# Altium PCB PIC12F675_ADC_PWM.PcbDoc
Units mil, origin at the board's own origin, x right, y up, seen from the top; angles counter-clockwise.
Board outline 1975 x 1050 mil, 2 copper layers (Top Layer, Bottom Layer); 24 components, 14 nets, 64 pads, 8 vias.
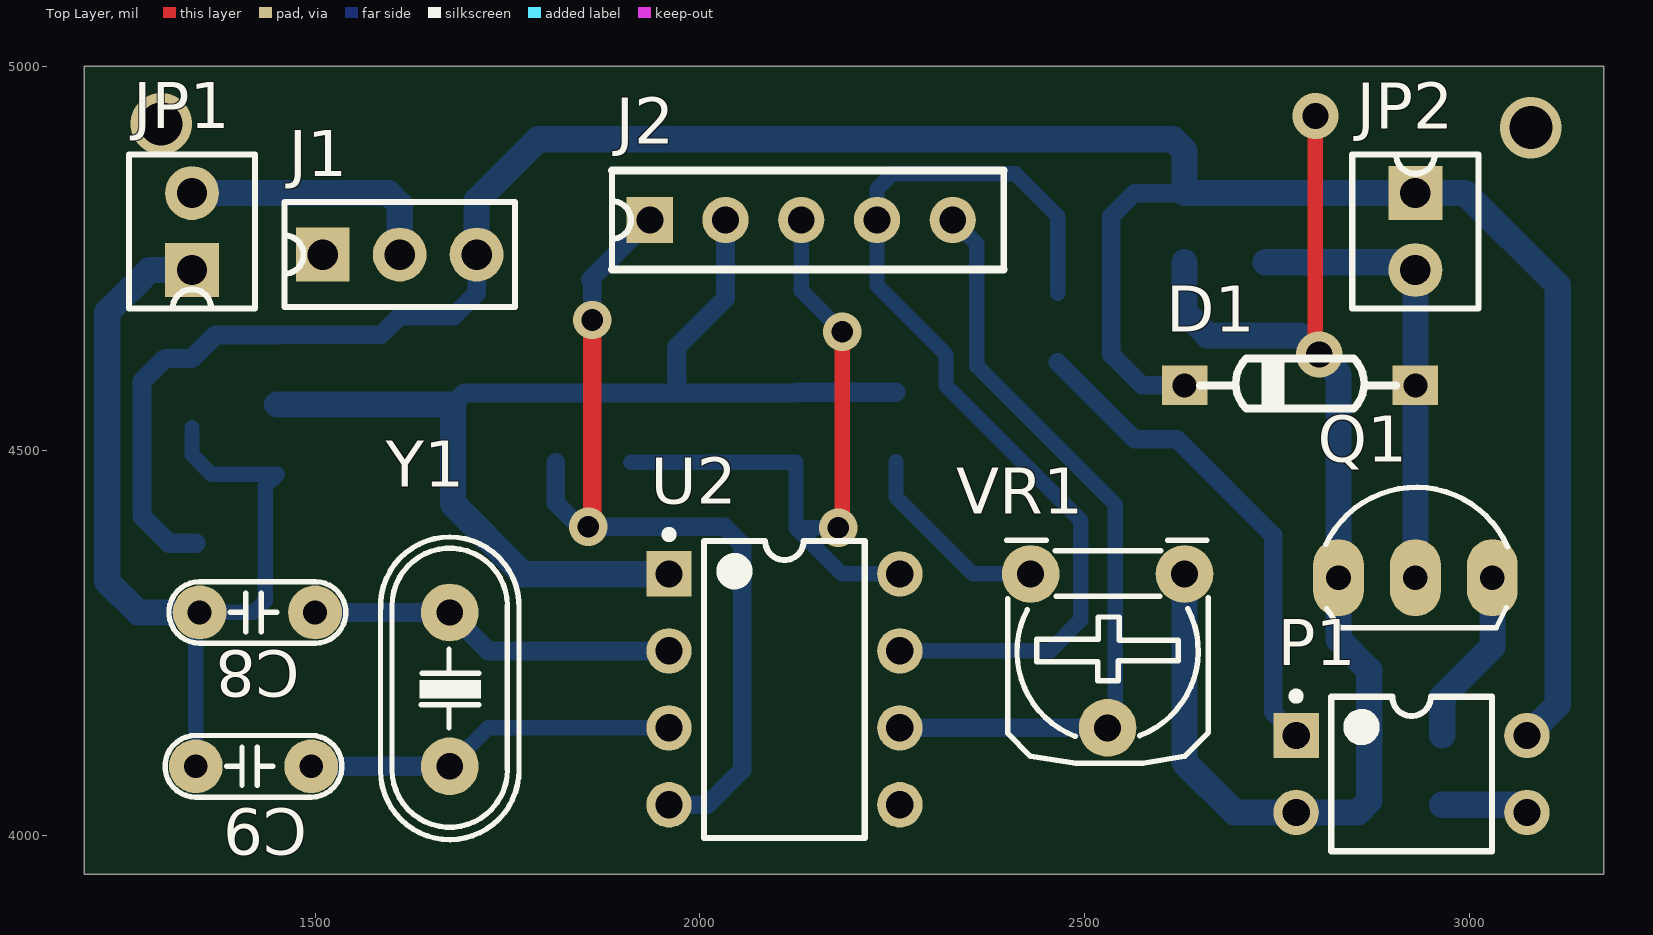
[diagram p0: Top Layer view]
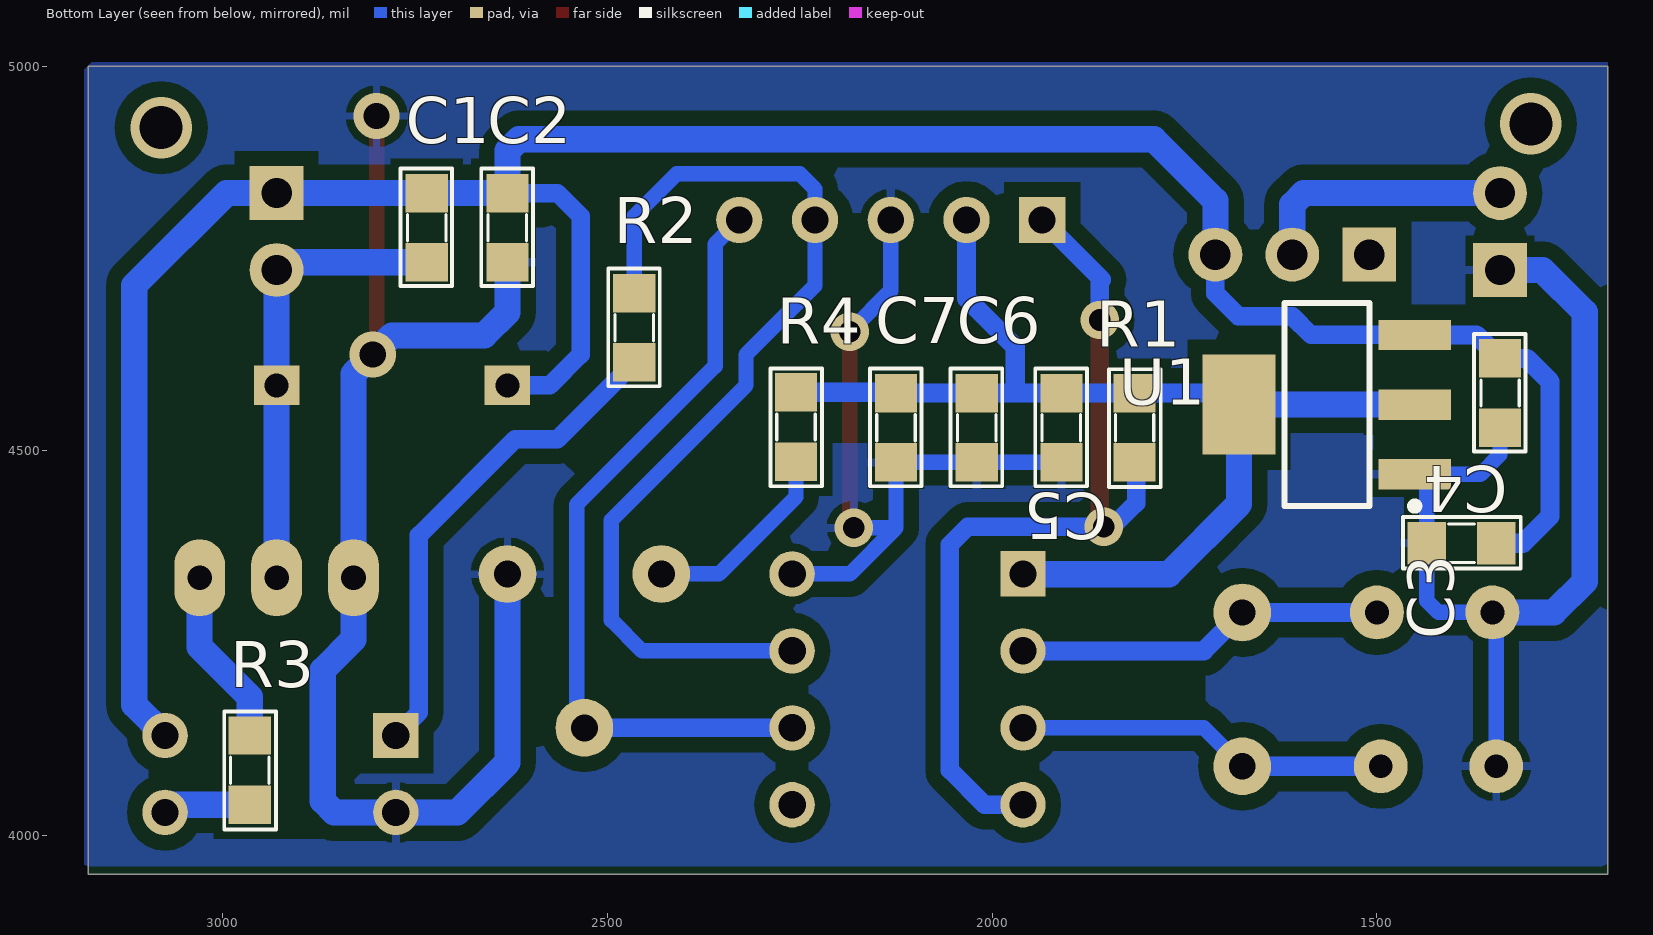
[diagram p1: Bottom Layer view, seen from below]
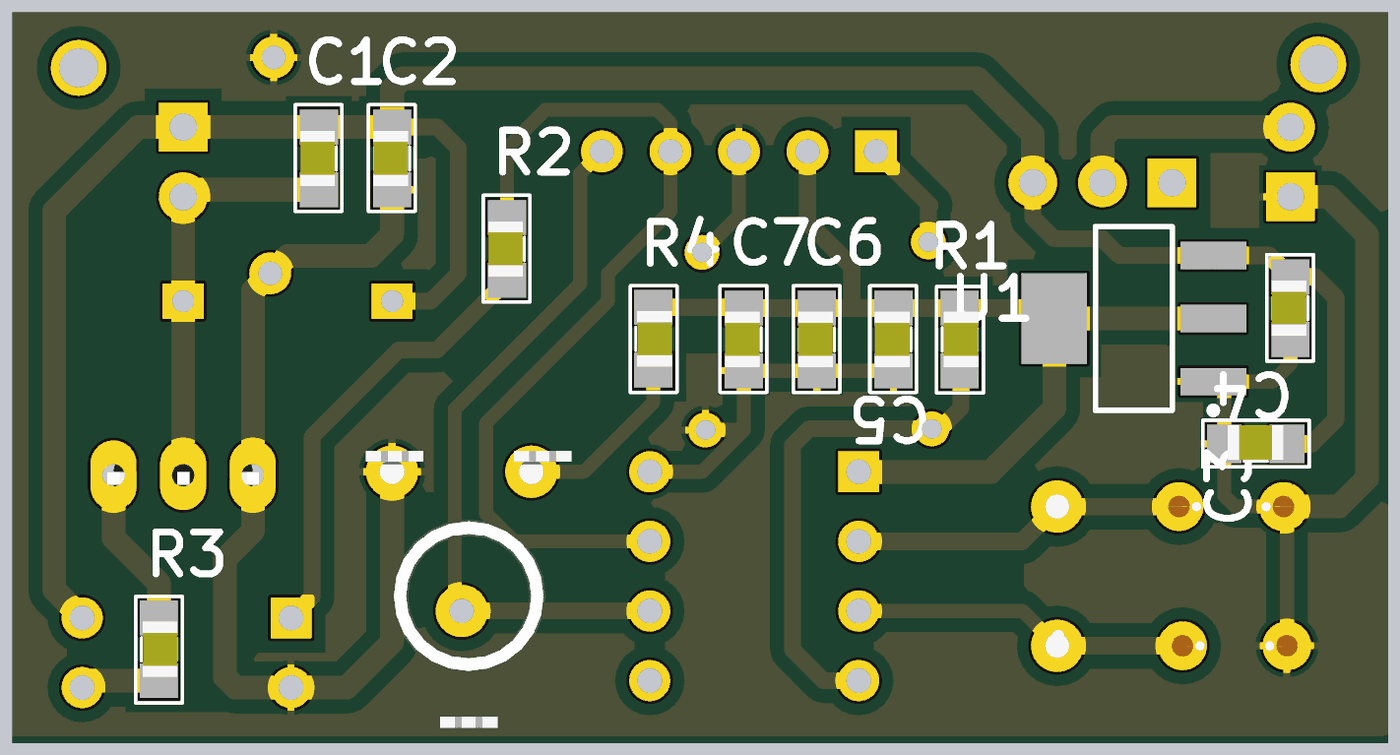
[diagram p2: 3D render of the assembled board from below, using the file's embedded part models]

## Layer stack, top to bottom
Top Solder: solder mask 0.4, Solder Resist, Dk 3.5
Top Layer: signal copper 1.4
Dielectric 1: dielectric 12.6, FR-4, Dk 4.8
Bottom Layer: signal copper 1.4
Bottom Solder: solder mask 0.4, Solder Resist, Dk 3.5

## Board outline
1200,5000 3175,5000 3175,3950 1200,3950 1200,4995 1200,5000

## Design rules (kind name [scope] priority, off if disabled: settings)
Clearance [All] p1: gap=20
PolygonConnect [All] p1: connectstyle=Relief reliefconductorwidth=10 reliefentries=4 polygonreliefangle="90 Angle" airgapwidth=10
RoutingVias [All] p1: holewidth=28 width=50 viastyle="Through Hole" minholewidth=28 minwidth=50 maxholewidth=28 maxwidth=50
SolderMaskExpansion [All] p1: expansion=4
Width [All] p1: maxlimit=34 minlimit=20 preferedwidth=25
30 further rules are at their usual default settings.

## Components (designator, comment, footprint, x,y, rotation, side; value= is the part's Value field where it differs from the comment)
C1 "104" 0805 2735,4790 r270 bottom
C2 "10uF" 0805 2630,4790 r270 bottom
C3 "10uF" 0805 1390,4380 r0 bottom
C4 "104" 0805 1340,4575 r270 bottom
C5 "10uF" 0805 1910,4530 r270 bottom
C6 "104" 0805 2020,4530 r270 bottom
C7 "10u" 0805 2125,4530 r270 bottom
C8 "103" CN1.5 1350,4290 r0 top
C9 "103" CN1.5 1345,4090 r0 top
D1 "DIODE" DIODE/NOM/0.5A 2930,4585 r180 top
J1 "CON3" CON3 1510,4755 r90 top
J2 "ICSP" con5 1935,4800 r90 top
JP1 "JP2" CON2 1340,4735 r180 top
JP2 "JP2" CON2 2930,4835 r0 top
P1 "PC817" DIP-4 2925,4080 r0 top
Q1 "C2073" QTO-92 2930,4335 r0 top
R1 "10k" 0805 1815,4530 r90 bottom
R2 "150" 0805 2465,4660 r270 bottom
R3 "150" 0805 2965,4085 r90 bottom
R4 "33k" 0805 2255,4531 r90 bottom
U1 "LM1117-3.3V" SOT223-4N 1565,4560 r0 bottom
U2 "PIC12F683-I/P" PDIP300-P8 2110,4190 r0 top
VR1 "10K" VR 2630,4340 r180 top
Y1 "20MHz" XT2 1675,4190 r270 top

## Footprints (in the part's own frame and the unit in brackets; to place one, negate y for a bottom-side part, rotate by r counter-clockwise, add the part's x,y. Pads: shape width x height; smd on the part's side, far side on the other; paste and mask are expansions set on the pad)
0805 [mil] "Compoment SMD 80x50mil"
  rect 50x55 smd: 1(-45,0) 2(45,0)
  silkscreen extent -77,-34 76,33, body extent -40,-27 40,23, height 24
CN1.5 [mil]
  round 70 hole 31: 1(0,0) 2(150,0)
  silkscreen extent -40,-40 190,40, body extent -40,-33 190,33, height 235
CON2 [mil]
  rect 70x70 hole 39.37 unplated: 1(0,0)
  round 70 hole 39.37 unplated: 2(0,-100)
  silkscreen extent -82,-150 82,50
CON3 [mil]
  rect 70x70 hole 39.37 unplated: 1(0,0)
  round 70 hole 39.37 unplated: 2(0,-100) 3(0,-200)
  silkscreen extent -68,-250 68,50
con5 [mil]
  rect 60x60 hole 35: 1(0,0)
  round 60 hole 35: 2(0,-98.42) 3(0,-196.85) 4(0,-295.28) 5(0,-393.7)
  silkscreen extent -64,-460 64,49
DIODE/NOM/0.5A [mm]
  rect 1.5x1.3 hole 0.8: 1(0,0) 2(7.62,0)
  silkscreen extent 0.64,-0.89 7.11,0.76
DIP-4 [mm] "DIP; 4 Leads; Row Spacing 7.62 mm; Pitch 2.54 mm"
  rect 1.5x1.5 hole 0.9: 1(-3.81,1.27)
  round 1.5 hole 0.9: 2(-3.81,-1.27) 3(3.81,-1.27) 4(3.81,1.27)
  silkscreen extent -3.93,-2.55 2.65,2.69, body extent -3.15,-2.5 3.15,2.5, height 5.6
PDIP300-P8 [mm] "DIP, 8-Leads, Row Spacing 7.62mm, Pitch 2.54mm, Body 9.5x6.6mm"
  rect 1.5x1.5 hole 0.9: 1(-3.81,3.81)
  round 1.5 hole 0.9: 2(-3.81,1.27) 3(-3.81,-1.27) 4(-3.81,-3.81) 5(3.81,-3.81) 6(3.81,-1.27) 7(3.81,1.27) 8(3.81,3.81)
  silkscreen extent -3.93,-4.9 2.65,5.23, body extent -3.55,-4.9 3.55,4.9, height 4.32
QTO-92 [mil] "TO-92"
  oval 66x100 hole 32: 1(-100,0) 2(0,0) 3(100,0)
  silkscreen extent -117,-65 120,118, body extent -109,-66 109,95, height 245
SOT223-4N [mm] "SOT223, 4-Leads, Body 6.5x3.5mm, Pitch 2.3mm, Lead Span 7mm, IPC Medium Density"
  rect 2.4x1 smd: 1(-2.9,2.3) 2(-2.9,0) 3(-2.9,-2.3)
  rect 2.4x3.3 smd: 4(2.9,0)
  silkscreen extent -3.02,-3.35 1.4,3.47, body extent -1.85,-3.35 1.85,3.35, height 1.8
VR [mil] "Resistor Variable"
  round 75 hole 35: 1(0,0) 2(100,200) 3(200,0)
  silkscreen extent -31,-44 231,246, body extent -87,-30 307,372, height 165
XT2 [mil] "Footpin for Crystal 2 pin"
  round 75 hole 34: 1(-100,0) 2(100,0)
  silkscreen extent -198,-90 195,90, body extent -233,-93 213,90, height 138

## Part data
C1 C2 C3 C4 C5 C6 C7: library part "CAP 0805"
C8 C9: library part CN1.5, "Cap np 682pF => 104pF"
D1: "Diode"
J1: "Connector"
J2: library part CON5, "Connector"
JP1 JP2: library part CON2, "Connector 2"
P1: "NPN PHOTO General Purpose Amplifier"
Q1: library part C1815, "NPN 600mW, ECB"
R1 R2 R3 R4: library part R1/4W, "Resistor 1/4W"
U1: library part LM1117_1, "800mA Low-Dropout Linear Regulator"
U2: "Flash-Based 8-Bit CMOS Microcontroller with nanoWatt Technology, 2K (x14-Bit words) Program Memory, 384 Bytes Data Memory, 8-Pin PDIP, Industrial Temperature"
VR1: library part "Var Resitor", "Var Resistor"
Y1: library part Crystal, "Crystal Oscillator"

## Via types
v1: diameter 50, hole 28, Top Layer to Bottom Layer, 4 vias
v2: diameter 80, hole 56, Top Layer to Bottom Layer, 2 vias
v3: diameter 60, hole 34, Top Layer to Bottom Layer, 2 vias

## Nets (pads, with @x,y where several pads share a name; then routed paths per layer and width w, separated by ;. In a path a pad name is that pad's centre, name@x,y a point inside that pad or via, vN(x,y) a via of type N, cw(c..) or ccw(c..) an arc to the next point about the centre after c; other vN are vias at no path point)
3V3: C5.1 C6.1 C7.1 J2.2 R1.2 R4.2 U1.2 U2.1 | length 1508.7
  Bottom Layer w25: 1679.17,4560 1694.17,4575 1845,4575 1970,4575 ; J2.2 2033.42,4698.43 1970,4635 1970,4575 ; C7.1 1970,4575 ; C7.1@2126,4576 R4.2
  Bottom Layer w34: U1.2 1679.17,4560 1679.17,4430.83 1770.47,4339.53 1959.53,4339.53 U2.1
9V: C1.1 C2.1 C3.1 C4.1 D1.2 J1.3 JP2.1 P1.4 U1.3 | length 3418.8
  Bottom Layer w24: U1.3 1585.55,4650.55 1610,4675 1680,4675 1710,4705 J1.3 ; C2.1 2565,4835 2535,4805 2535,4625 2575,4585 D1.2 D1.2@2635,4580
  Bottom Layer w25: C3.1 1310,4380 1275,4415 1275,4590 1305,4620 C4.1 1370.55,4650.55 U1.3
  Bottom Layer w34: J1.3 1710,4825 1790,4905 2615,4905 2630,4890 C2.1 C1.1 JP2.1 2995,4835 3115,4715 3115,4170 P1.4
GND: C2.2 C3.2 C4.2 C5.2 C6.2 C7.2 C8.1 C9.1 J2.3 JP1.1 P1.2 Q1.1 U1.1 U2.8 VR1.1 | length 3856.8
  Top Layer w20: v1@2185,4420 v1(2185,4655) ; v3@2800,4630 v3(2800,4935)
  Bottom Layer w20: C4.2 1340,4495 1365.55,4469.45 U1.1 1435,4453.62 C3.2 1435,4305 1420,4290 C8.1 1345,4285 C9.1 ; C5.2 C7.2 2125,4400 ; J2.3 2131.85,4708.15 v1(2185,4655) ; v1(2180,4400) 2125,4400 ; U2.8 2185,4340 2125,4400
  Bottom Layer w34: JP1.1 1285,4735 1230,4680 1230,4330 1270,4290 C8.1 ; C2.2 2630,4680 2660,4650 2780,4650 v3(2805,4625) 2830,4600 Q1.1 2830,4255 2870,4215 2870,4045 2855,4030 P1.2 2695,4030 2630,4095 VR1.1 VR1.1@2635,4335
ICSPCLK: J2.5 U2.6 VR1.2 | length 1035.8
  Bottom Layer w20: J2.5 2360,4768.7 2360,4610 2540,4430 2540,4160 VR1.2@2520,4140
  Bottom Layer w24: U2.6 VR1.2 VR1.2@2520,4140
ICSPDAT: J2.4 R2.1 U2.7 | length 1287.2
  Bottom Layer w20: U2.7 2455,4240 2495,4280 2495,4410 2320,4585 2320,4625 2230.28,4714.72 J2.4 2230.28,4840.28 2250,4860 2410,4860 2465,4805 R2.1
M\C\L\R\: J2.1 R1.1 U2.4 | length 1157.7
  Top Layer w24: v1(1855,4401.53) 1860,4406.53 v1(1860,4670)
  Bottom Layer w24: R1.1@1813,4485 1813,4432 1843.47,4401.53 v1(1855,4401.53) 2031.53,4401.53 2055,4378.06 2055,4085 2010,4040 U2.4 ; v1(1860,4670) 1860,4720 1857.5,4722.5 J2.1
NetC1_2: C1.2 D1.1 JP2.2 Q1.2 | length 584.1
  Bottom Layer w24: JP2.2@2920,4745 JP2.2
  Bottom Layer w34: C1.2 JP2.2@2920,4745 ; Q1.2 D1.1@2930,4570 ; D1.1 JP2.2
NetC8_2: C8.2 U2.2 Y1.1 | length 480.7
  Bottom Layer w25: C8.2 Y1.1 1725,4240 U2.2
NetC9_2: C9.2 U2.3 Y1.2 | length 485.7
  Bottom Layer w20: Y1.2 1725,4140 U2.3
  Bottom Layer w25: C9.2 Y1.2
NetJ1_2: J1.2 JP1.2 | length 341.2
  Bottom Layer w34: JP1.2 1595,4835 1610,4820 J1.2
NetP1_1: P1.1 R2.2 | length 645.6
  Bottom Layer w24: R2.2 2565,4515 2620,4515 2745,4390 2745,4160 P1.1
NetP1_3: P1.3 R3.1 | length 114.1
  Bottom Layer w20: P1.3@3065,4040 P1.3
  Bottom Layer w34: R3.1 P1.3@3065,4040
NetR4_1: R4.1 VR1.3 | length 262.4
  Bottom Layer w20: R4.1 2255,4440 2355,4340 VR1.3
PULSE: Q1.3 R3.2 | length 231.9
  Bottom Layer w34: R3.2 2965,4180 3030,4245 Q1.3
pads on no net: J1.1 U1.4 U2.5
copper on no net:
  other v2: 3080,4920 1300,4925

## Polygon pours and split planes (outlines as drawn)
GND on Bottom Layer "Bottom Layer-No Net" (solid, remove dead copper, pour order 2): 3180,3955 3180,4995 3175,5000 3170,5005 1200,5005 1200,3950 1210,3960 3175,3960

## Other copper
Bottom Layer:
  pour cut-out: 2270,4305 2270,4280 2273.98,4283.98 2283.24,4283.98 2283.24,4288.56 2270.32,4301.49
  pour cut-out: 1722.5,4212.5 1762.5,4212.5 1767.5,4207.5 1722.5,4162.5
  pour cut-out: 2570.26,4310.61 2592.68,4310.61 2592.68,4252.32 2595,4250 2570,4250 2570,4310.35
  pour cut-out: 2905,4075 2920,4060 2917.5,3995 2867.19,3995 2905,4045
  pour cut-out: 2675,4775 2680,4770 2687.5,4770 2687.5,4710 2689.82,4707.68 2887.32,4707.68 2900,4695 2900,4625 2886.81,4625 2880.47,4618.66 2885,4614.13 2885,4550 2865,4550 2862.32,4552.68 2862.32,4620.46 2820.72,4662.06 2802.94,4662.06 2785,4680 2675,4680 2675,4692.32 2660,4707.32 2660,4775
  pour cut-out: 2450,4575 2455.74,4569.26 2471.21,4569.26 2556.65,4483.82 2540,4467.18 2540,4465 2440,4565
  pour cut-out: 1370,4535 1370,4495 1435,4495 1440,4490 1505,4490 1505,4535
  pour cut-out: 1377.5,4515.86 1379.12,4515.86 1388.58,4525.31 1388.9,4525 1505,4525 1505,4502.2 1508.07,4499.13
  pour cut-out: 1304.77,4475.54 1305,4475.77 1305,4480
  pour cut-out: 1319.77,4478.52 1316.78,4475.54 1304.77,4475.54 1304.77,4427.33 1309.6,4422.5 1385,4422.5 1385.21,4422.29 1385.21,4319.35 1387.5,4317.06 1407.94,4317.06 1407.94,4342.5 1400,4342.5 1400,4375 1410,4375 1410,4437.7 1397.7,4450 1348.29,4450
  pour cut-out: 2595,4805 2592.5,4802.5 2592.5,4777.5 2600,4770 2695,4770 2695,4800 2690,4805
  pour cut-out: 1807.5,4520 1802.5,4525 1802.5,4535 1887.5,4535 1887.5,4545.23 1927.5,4545.23 1927.5,4535 2002.27,4535 2012.5,4545.23 2154.77,4545.23 2156.23,4546.23 2167.5,4546.23 2201.74,4546.23 2212.5,4536 2215,4510 2180,4510 2175,4510 2130,4510 2120,4510 2117.94,4512.06 2007.5,4512.06 2005.44,4510 1805,4510 1807.5,4512.5